# Altium PCB v1_1_1.PcbDoc (part 1 of 2)
Units mil, origin at the board's own origin, x right, y up, seen from the top; angles counter-clockwise.
Board outline 6000 x 5000 mil, 4 copper layers (Top Layer, Inner Layer 1, Inner Layer 2, Bottom Layer), stack 61.811 mil thick; 59 components, 65 nets, 368 pads, 8 vias.
Unrouted connection lines stored in the file: 222.
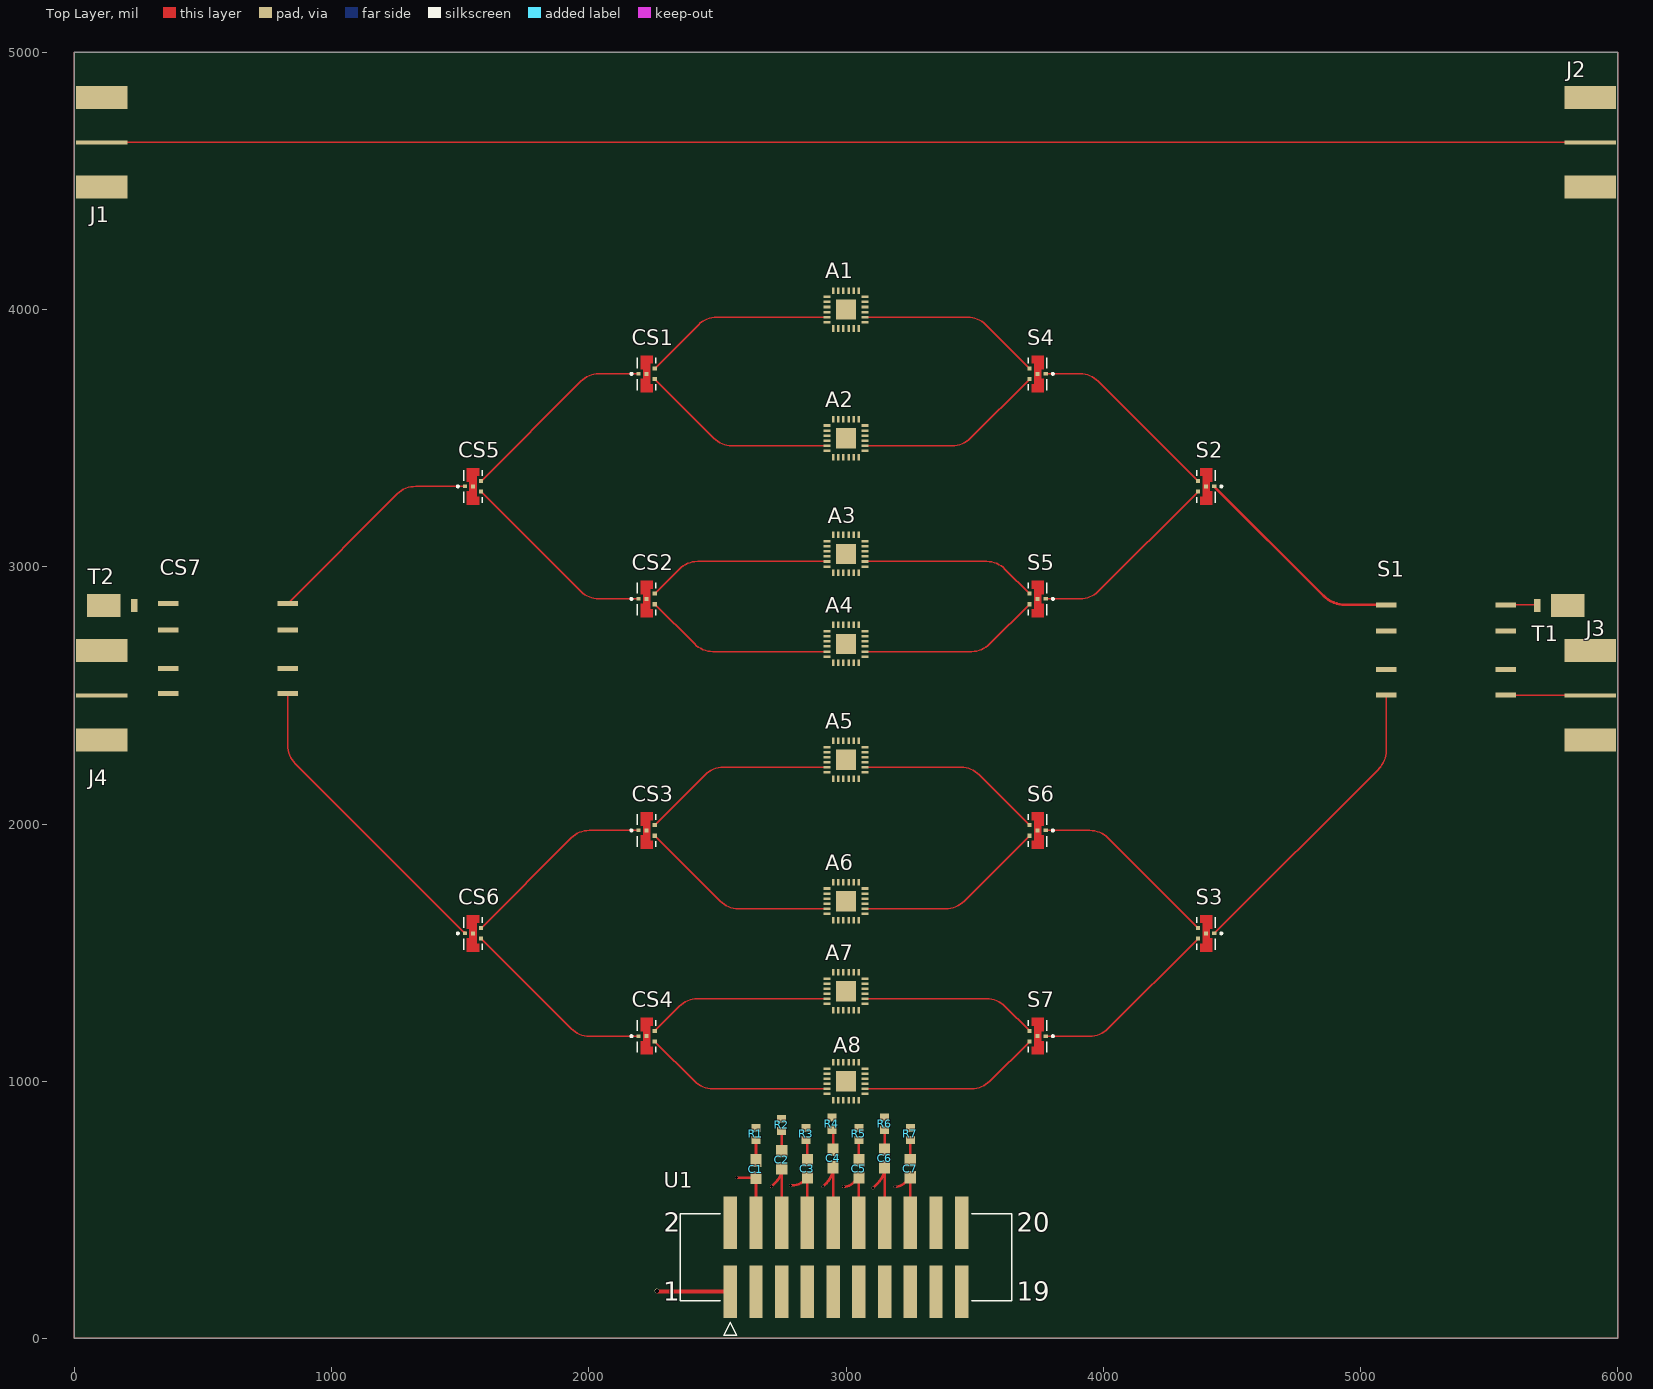
[diagram p0: Top Layer view]
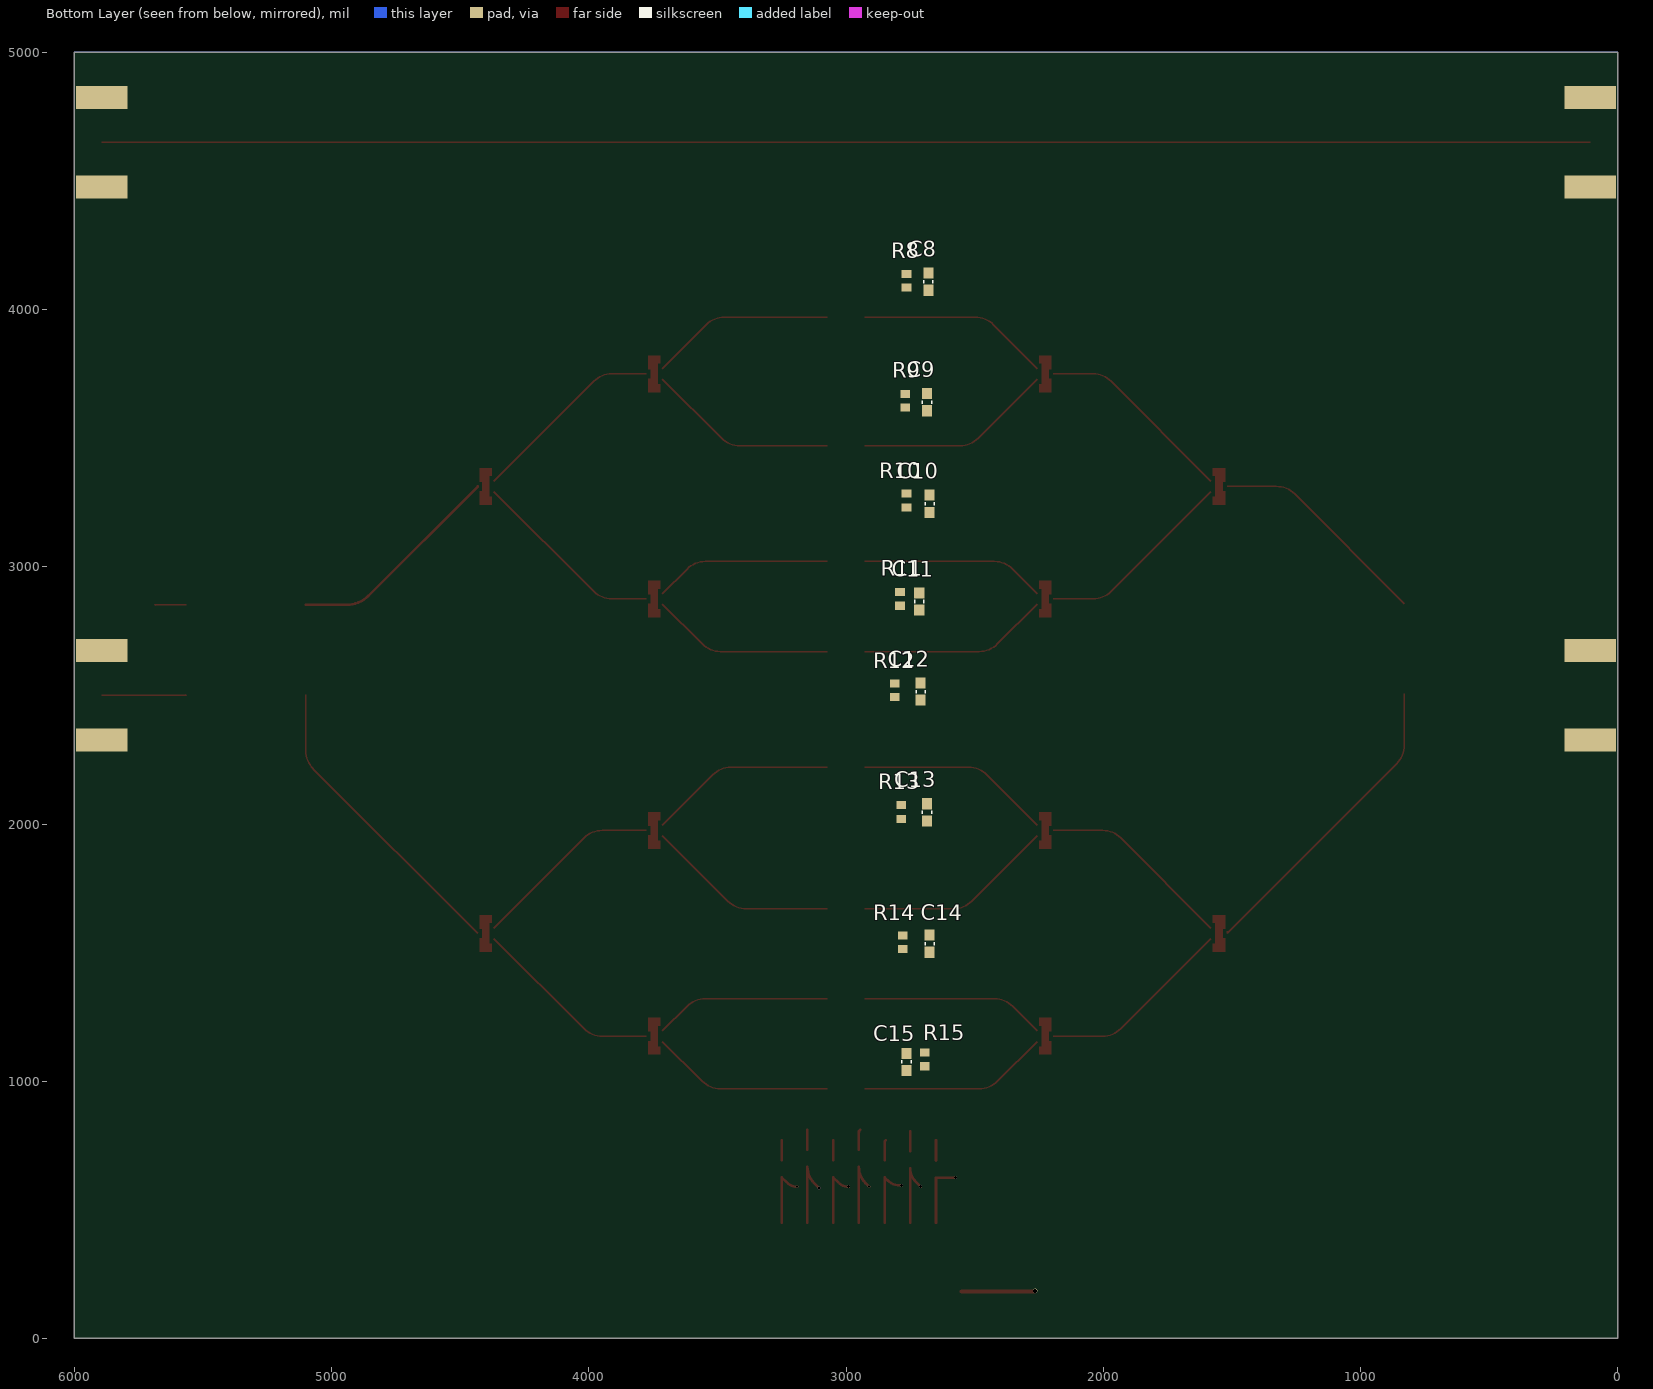
[diagram p1: Bottom Layer view, seen from below]

## Layer stack, top to bottom
Top Solder: solder mask 0.4, Solder Resist, Dk 3.5
Top Layer: signal copper 1.3779
JLC2313-1: prepreg 3.937, 2313, Dk 4.05
Inner Layer 1: signal copper 0.6889
Core: dielectric 49.8031, FR-4, Dk 4.8
Inner Layer 2: signal copper 0.6889
JLC2313-2: prepreg 3.937, 2313, Dk 4.05
Bottom Layer: signal copper 1.3779
Bottom Solder: solder mask 0.4, Solder Resist, Dk 3.5

## Board outline
0,0 6000,0 6000,5000 0,5000

## Design rules (kind name [scope] priority, off if disabled: settings)
Clearance "Schematic Clearance Constraint" [InNet('C1_0_1')] p1: gap=10 ignorepadtopadclearanceinfootprint=FALSE except(0: Arc-Hole Track-Hole SMDPad-Hole THPad-Hole Via-Hole Fill-Hole Poly-Hole Region-Hole Text-Hole; 6: Arc-Via Track-Via; 15: Arc-Arc Arc-Track Track-Track)
Clearance [All] p2: gap=10 ignorepadtopadclearanceinfootprint=FALSE except(0: Arc-Hole Track-Hole SMDPad-Hole THPad-Hole Via-Hole Fill-Hole Poly-Hole Region-Hole Text-Hole)
PolygonConnect [All] p1: connectstyle=Relief reliefconductorwidth=10 reliefentries=4 polygonreliefangle="90 Angle" airgapwidth=10
RoutingVias [All] p1: holewidth=28 width=50 viastyle="Through Hole" minholewidth=28 minwidth=50 maxholewidth=28 maxwidth=50
SolderMaskExpansion [All] p1: expansion=4
Width "Schematic Width Constraint_66" [InNet('VDD')] p1: maxlimit=16 minlimit=10 preferedwidth=10 toplayer_prefwidth=16 midlayer1_maxwidth=10 midlayer2_maxwidth=10 bottomlayer_maxwidth=10 substack1={533BCD00-AA76-48C8-A1A6-F2B08F64B16E} toplayer_{533bcd00-aa76-48c8-a1a6-f2b08f64b16e}_maxwidth=10 toplayer_{533bcd00-aa76-48c8-a1a6-f2b08f64b16e}_prefwidth=16 midlayer1_{533bcd00-aa76-48c8-a1a6-f2b08f64b16e}_maxwidth=10 midlayer1_{533bcd00-aa76-48c8-a1a6-f2b08f64b16e}_prefwidth=16 midlayer2_{533bcd00-aa76-48c8-a1a6-f2b08f64b16e}_maxwidth=10 midlayer2_{533bcd00-aa76-48c8-a1a6-f2b08f64b16e}_prefwidth=16 bottomlayer_{533bcd00-aa76-48c8-a1a6-f2b08f64b16e}_maxwidth=10 bottomlayer_{533bcd00-aa76-48c8-a1a6-f2b08f64b16e}_prefwidth=16 minimp=50.000000 maximp=50.000000 favimp=50.000000
Width "Schematic Width Constraint_65" [InNet('GND')] p2: maxlimit=16 minlimit=10 preferedwidth=10 toplayer_prefwidth=16 midlayer1_maxwidth=10 midlayer2_maxwidth=10 bottomlayer_maxwidth=10 substack1={533BCD00-AA76-48C8-A1A6-F2B08F64B16E} toplayer_{533bcd00-aa76-48c8-a1a6-f2b08f64b16e}_maxwidth=10 toplayer_{533bcd00-aa76-48c8-a1a6-f2b08f64b16e}_prefwidth=16 midlayer1_{533bcd00-aa76-48c8-a1a6-f2b08f64b16e}_maxwidth=10 midlayer1_{533bcd00-aa76-48c8-a1a6-f2b08f64b16e}_prefwidth=16 midlayer2_{533bcd00-aa76-48c8-a1a6-f2b08f64b16e}_maxwidth=10 midlayer2_{533bcd00-aa76-48c8-a1a6-f2b08f64b16e}_prefwidth=16 bottomlayer_{533bcd00-aa76-48c8-a1a6-f2b08f64b16e}_maxwidth=10 bottomlayer_{533bcd00-aa76-48c8-a1a6-f2b08f64b16e}_prefwidth=16 minimp=50.000000 maximp=50.000000 favimp=50.000000
Width "Schematic Width Constraint_64" [InNet('S7_90_2')] p3: maxlimit=10 minlimit=5.78 preferedwidth=10 toplayer_maxwidth=5.78 midlayer1_minwidth=10 midlayer2_minwidth=10 bottomlayer_minwidth=10 substack1={533BCD00-AA76-48C8-A1A6-F2B08F64B16E} toplayer_{533bcd00-aa76-48c8-a1a6-f2b08f64b16e}_minwidth=10 toplayer_{533bcd00-aa76-48c8-a1a6-f2b08f64b16e}_maxwidth=5.78 toplayer_{533bcd00-aa76-48c8-a1a6-f2b08f64b16e}_prefwidth=5.78 midlayer1_{533bcd00-aa76-48c8-a1a6-f2b08f64b16e}_minwidth=10 midlayer1_{533bcd00-aa76-48c8-a1a6-f2b08f64b16e}_maxwidth=5.78 midlayer1_{533bcd00-aa76-48c8-a1a6-f2b08f64b16e}_prefwidth=5.78 midlayer2_{533bcd00-aa76-48c8-a1a6-f2b08f64b16e}_minwidth=10 midlayer2_{533bcd00-aa76-48c8-a1a6-f2b08f64b16e}_maxwidth=5.78 midlayer2_{533bcd00-aa76-48c8-a1a6-f2b08f64b16e}_prefwidth=5.78 bottomlayer_{533bcd00-aa76-48c8-a1a6-f2b08f64b16e}_minwidth=10 bottomlayer_{533bcd00-aa76-48c8-a1a6-f2b08f64b16e}_maxwidth=5.78 bottomlayer_{533bcd00-aa76-48c8-a1a6-f2b08f64b16e}_prefwidth=5.78 minimp=50.000000 maximp=50.000000 favimp=50.000000
Width "Schematic Width Constraint_63" [InNet('S7_90_1')] p4: maxlimit=10 minlimit=5.78 preferedwidth=10 toplayer_maxwidth=5.78 midlayer1_minwidth=10 midlayer2_minwidth=10 bottomlayer_minwidth=10 substack1={533BCD00-AA76-48C8-A1A6-F2B08F64B16E} toplayer_{533bcd00-aa76-48c8-a1a6-f2b08f64b16e}_minwidth=10 toplayer_{533bcd00-aa76-48c8-a1a6-f2b08f64b16e}_maxwidth=5.78 toplayer_{533bcd00-aa76-48c8-a1a6-f2b08f64b16e}_prefwidth=5.78 midlayer1_{533bcd00-aa76-48c8-a1a6-f2b08f64b16e}_minwidth=10 midlayer1_{533bcd00-aa76-48c8-a1a6-f2b08f64b16e}_maxwidth=5.78 midlayer1_{533bcd00-aa76-48c8-a1a6-f2b08f64b16e}_prefwidth=5.78 midlayer2_{533bcd00-aa76-48c8-a1a6-f2b08f64b16e}_minwidth=10 midlayer2_{533bcd00-aa76-48c8-a1a6-f2b08f64b16e}_maxwidth=5.78 midlayer2_{533bcd00-aa76-48c8-a1a6-f2b08f64b16e}_prefwidth=5.78 bottomlayer_{533bcd00-aa76-48c8-a1a6-f2b08f64b16e}_minwidth=10 bottomlayer_{533bcd00-aa76-48c8-a1a6-f2b08f64b16e}_maxwidth=5.78 bottomlayer_{533bcd00-aa76-48c8-a1a6-f2b08f64b16e}_prefwidth=5.78 minimp=50.000000 maximp=50.000000 favimp=50.000000
Width "Schematic Width Constraint_30" [InNet('S6_90_2')] p5: maxlimit=10 minlimit=5.78 preferedwidth=10 toplayer_maxwidth=5.78 midlayer1_minwidth=10 midlayer2_minwidth=10 bottomlayer_minwidth=10 substack1={533BCD00-AA76-48C8-A1A6-F2B08F64B16E} toplayer_{533bcd00-aa76-48c8-a1a6-f2b08f64b16e}_minwidth=10 toplayer_{533bcd00-aa76-48c8-a1a6-f2b08f64b16e}_maxwidth=5.78 toplayer_{533bcd00-aa76-48c8-a1a6-f2b08f64b16e}_prefwidth=5.78 midlayer1_{533bcd00-aa76-48c8-a1a6-f2b08f64b16e}_minwidth=10 midlayer1_{533bcd00-aa76-48c8-a1a6-f2b08f64b16e}_maxwidth=5.78 midlayer1_{533bcd00-aa76-48c8-a1a6-f2b08f64b16e}_prefwidth=5.78 midlayer2_{533bcd00-aa76-48c8-a1a6-f2b08f64b16e}_minwidth=10 midlayer2_{533bcd00-aa76-48c8-a1a6-f2b08f64b16e}_maxwidth=5.78 midlayer2_{533bcd00-aa76-48c8-a1a6-f2b08f64b16e}_prefwidth=5.78 bottomlayer_{533bcd00-aa76-48c8-a1a6-f2b08f64b16e}_minwidth=10 bottomlayer_{533bcd00-aa76-48c8-a1a6-f2b08f64b16e}_maxwidth=5.78 bottomlayer_{533bcd00-aa76-48c8-a1a6-f2b08f64b16e}_prefwidth=5.78 minimp=50.000000 maximp=50.000000 favimp=50.000000
Width "Schematic Width Constraint_29" [InNet('S6_90_1')] p6: maxlimit=10 minlimit=5.78 preferedwidth=10 toplayer_maxwidth=5.78 midlayer1_minwidth=10 midlayer2_minwidth=10 bottomlayer_minwidth=10 substack1={533BCD00-AA76-48C8-A1A6-F2B08F64B16E} toplayer_{533bcd00-aa76-48c8-a1a6-f2b08f64b16e}_minwidth=10 toplayer_{533bcd00-aa76-48c8-a1a6-f2b08f64b16e}_maxwidth=5.78 toplayer_{533bcd00-aa76-48c8-a1a6-f2b08f64b16e}_prefwidth=5.78 midlayer1_{533bcd00-aa76-48c8-a1a6-f2b08f64b16e}_minwidth=10 midlayer1_{533bcd00-aa76-48c8-a1a6-f2b08f64b16e}_maxwidth=5.78 midlayer1_{533bcd00-aa76-48c8-a1a6-f2b08f64b16e}_prefwidth=5.78 midlayer2_{533bcd00-aa76-48c8-a1a6-f2b08f64b16e}_minwidth=10 midlayer2_{533bcd00-aa76-48c8-a1a6-f2b08f64b16e}_maxwidth=5.78 midlayer2_{533bcd00-aa76-48c8-a1a6-f2b08f64b16e}_prefwidth=5.78 bottomlayer_{533bcd00-aa76-48c8-a1a6-f2b08f64b16e}_minwidth=10 bottomlayer_{533bcd00-aa76-48c8-a1a6-f2b08f64b16e}_maxwidth=5.78 bottomlayer_{533bcd00-aa76-48c8-a1a6-f2b08f64b16e}_prefwidth=5.78 minimp=50.000000 maximp=50.000000 favimp=50.000000
Width "Schematic Width Constraint_28" [InNet('S5_0_2')] p7: maxlimit=10 minlimit=5.78 preferedwidth=10 toplayer_maxwidth=5.78 midlayer1_minwidth=10 midlayer2_minwidth=10 bottomlayer_minwidth=10 substack1={533BCD00-AA76-48C8-A1A6-F2B08F64B16E} toplayer_{533bcd00-aa76-48c8-a1a6-f2b08f64b16e}_minwidth=10 toplayer_{533bcd00-aa76-48c8-a1a6-f2b08f64b16e}_maxwidth=5.78 toplayer_{533bcd00-aa76-48c8-a1a6-f2b08f64b16e}_prefwidth=5.78 midlayer1_{533bcd00-aa76-48c8-a1a6-f2b08f64b16e}_minwidth=10 midlayer1_{533bcd00-aa76-48c8-a1a6-f2b08f64b16e}_maxwidth=5.78 midlayer1_{533bcd00-aa76-48c8-a1a6-f2b08f64b16e}_prefwidth=5.78 midlayer2_{533bcd00-aa76-48c8-a1a6-f2b08f64b16e}_minwidth=10 midlayer2_{533bcd00-aa76-48c8-a1a6-f2b08f64b16e}_maxwidth=5.78 midlayer2_{533bcd00-aa76-48c8-a1a6-f2b08f64b16e}_prefwidth=5.78 bottomlayer_{533bcd00-aa76-48c8-a1a6-f2b08f64b16e}_minwidth=10 bottomlayer_{533bcd00-aa76-48c8-a1a6-f2b08f64b16e}_maxwidth=5.78 bottomlayer_{533bcd00-aa76-48c8-a1a6-f2b08f64b16e}_prefwidth=5.78 minimp=50.000000 maximp=50.000000 favimp=50.000000
Width "Schematic Width Constraint_27" [InNet('S5_0_1')] p8: maxlimit=10 minlimit=5.78 preferedwidth=10 toplayer_maxwidth=5.78 midlayer1_minwidth=10 midlayer2_minwidth=10 bottomlayer_minwidth=10 substack1={533BCD00-AA76-48C8-A1A6-F2B08F64B16E} toplayer_{533bcd00-aa76-48c8-a1a6-f2b08f64b16e}_minwidth=10 toplayer_{533bcd00-aa76-48c8-a1a6-f2b08f64b16e}_maxwidth=5.78 toplayer_{533bcd00-aa76-48c8-a1a6-f2b08f64b16e}_prefwidth=5.78 midlayer1_{533bcd00-aa76-48c8-a1a6-f2b08f64b16e}_minwidth=10 midlayer1_{533bcd00-aa76-48c8-a1a6-f2b08f64b16e}_maxwidth=5.78 midlayer1_{533bcd00-aa76-48c8-a1a6-f2b08f64b16e}_prefwidth=5.78 midlayer2_{533bcd00-aa76-48c8-a1a6-f2b08f64b16e}_minwidth=10 midlayer2_{533bcd00-aa76-48c8-a1a6-f2b08f64b16e}_maxwidth=5.78 midlayer2_{533bcd00-aa76-48c8-a1a6-f2b08f64b16e}_prefwidth=5.78 bottomlayer_{533bcd00-aa76-48c8-a1a6-f2b08f64b16e}_minwidth=10 bottomlayer_{533bcd00-aa76-48c8-a1a6-f2b08f64b16e}_maxwidth=5.78 bottomlayer_{533bcd00-aa76-48c8-a1a6-f2b08f64b16e}_prefwidth=5.78 minimp=50.000000 maximp=50.000000 favimp=50.000000
Width "Schematic Width Constraint_26" [InNet('S4_0_2')] p9: maxlimit=10 minlimit=5.78 preferedwidth=10 toplayer_maxwidth=5.78 midlayer1_minwidth=10 midlayer2_minwidth=10 bottomlayer_minwidth=10 substack1={533BCD00-AA76-48C8-A1A6-F2B08F64B16E} toplayer_{533bcd00-aa76-48c8-a1a6-f2b08f64b16e}_minwidth=10 toplayer_{533bcd00-aa76-48c8-a1a6-f2b08f64b16e}_maxwidth=5.78 toplayer_{533bcd00-aa76-48c8-a1a6-f2b08f64b16e}_prefwidth=5.78 midlayer1_{533bcd00-aa76-48c8-a1a6-f2b08f64b16e}_minwidth=10 midlayer1_{533bcd00-aa76-48c8-a1a6-f2b08f64b16e}_maxwidth=5.78 midlayer1_{533bcd00-aa76-48c8-a1a6-f2b08f64b16e}_prefwidth=5.78 midlayer2_{533bcd00-aa76-48c8-a1a6-f2b08f64b16e}_minwidth=10 midlayer2_{533bcd00-aa76-48c8-a1a6-f2b08f64b16e}_maxwidth=5.78 midlayer2_{533bcd00-aa76-48c8-a1a6-f2b08f64b16e}_prefwidth=5.78 bottomlayer_{533bcd00-aa76-48c8-a1a6-f2b08f64b16e}_minwidth=10 bottomlayer_{533bcd00-aa76-48c8-a1a6-f2b08f64b16e}_maxwidth=5.78 bottomlayer_{533bcd00-aa76-48c8-a1a6-f2b08f64b16e}_prefwidth=5.78 minimp=50.000000 maximp=50.000000 favimp=50.000000
Width "Schematic Width Constraint_25" [InNet('NetCS7_4')] p10: maxlimit=10 minlimit=5.78 preferedwidth=10 toplayer_maxwidth=5.78 midlayer1_minwidth=10 midlayer2_minwidth=10 bottomlayer_minwidth=10 substack1={533BCD00-AA76-48C8-A1A6-F2B08F64B16E} toplayer_{533bcd00-aa76-48c8-a1a6-f2b08f64b16e}_minwidth=10 toplayer_{533bcd00-aa76-48c8-a1a6-f2b08f64b16e}_maxwidth=5.78 toplayer_{533bcd00-aa76-48c8-a1a6-f2b08f64b16e}_prefwidth=5.78 midlayer1_{533bcd00-aa76-48c8-a1a6-f2b08f64b16e}_minwidth=10 midlayer1_{533bcd00-aa76-48c8-a1a6-f2b08f64b16e}_maxwidth=5.78 midlayer1_{533bcd00-aa76-48c8-a1a6-f2b08f64b16e}_prefwidth=5.78 midlayer2_{533bcd00-aa76-48c8-a1a6-f2b08f64b16e}_minwidth=10 midlayer2_{533bcd00-aa76-48c8-a1a6-f2b08f64b16e}_maxwidth=5.78 midlayer2_{533bcd00-aa76-48c8-a1a6-f2b08f64b16e}_prefwidth=5.78 bottomlayer_{533bcd00-aa76-48c8-a1a6-f2b08f64b16e}_minwidth=10 bottomlayer_{533bcd00-aa76-48c8-a1a6-f2b08f64b16e}_maxwidth=5.78 bottomlayer_{533bcd00-aa76-48c8-a1a6-f2b08f64b16e}_prefwidth=5.78 minimp=50.000000 maximp=50.000000 favimp=50.000000
Width "Schematic Width Constraint_24" [InNet('NetS1_8')] p11: maxlimit=10 minlimit=5.78 preferedwidth=10 toplayer_maxwidth=5.78 midlayer1_minwidth=10 midlayer2_minwidth=10 bottomlayer_minwidth=10 substack1={533BCD00-AA76-48C8-A1A6-F2B08F64B16E} toplayer_{533bcd00-aa76-48c8-a1a6-f2b08f64b16e}_minwidth=10 toplayer_{533bcd00-aa76-48c8-a1a6-f2b08f64b16e}_maxwidth=5.78 toplayer_{533bcd00-aa76-48c8-a1a6-f2b08f64b16e}_prefwidth=5.78 midlayer1_{533bcd00-aa76-48c8-a1a6-f2b08f64b16e}_minwidth=10 midlayer1_{533bcd00-aa76-48c8-a1a6-f2b08f64b16e}_maxwidth=5.78 midlayer1_{533bcd00-aa76-48c8-a1a6-f2b08f64b16e}_prefwidth=5.78 midlayer2_{533bcd00-aa76-48c8-a1a6-f2b08f64b16e}_minwidth=10 midlayer2_{533bcd00-aa76-48c8-a1a6-f2b08f64b16e}_maxwidth=5.78 midlayer2_{533bcd00-aa76-48c8-a1a6-f2b08f64b16e}_prefwidth=5.78 bottomlayer_{533bcd00-aa76-48c8-a1a6-f2b08f64b16e}_minwidth=10 bottomlayer_{533bcd00-aa76-48c8-a1a6-f2b08f64b16e}_maxwidth=5.78 bottomlayer_{533bcd00-aa76-48c8-a1a6-f2b08f64b16e}_prefwidth=5.78 minimp=50.000000 maximp=50.000000 favimp=50.000000
Width "Schematic Width Constraint_22" [InNet('C7_90')] p12: maxlimit=10 minlimit=5.78 preferedwidth=10 toplayer_maxwidth=5.78 midlayer1_minwidth=10 midlayer2_minwidth=10 bottomlayer_minwidth=10 substack1={533BCD00-AA76-48C8-A1A6-F2B08F64B16E} toplayer_{533bcd00-aa76-48c8-a1a6-f2b08f64b16e}_minwidth=10 toplayer_{533bcd00-aa76-48c8-a1a6-f2b08f64b16e}_maxwidth=5.78 toplayer_{533bcd00-aa76-48c8-a1a6-f2b08f64b16e}_prefwidth=5.78 midlayer1_{533bcd00-aa76-48c8-a1a6-f2b08f64b16e}_minwidth=10 midlayer1_{533bcd00-aa76-48c8-a1a6-f2b08f64b16e}_maxwidth=5.78 midlayer1_{533bcd00-aa76-48c8-a1a6-f2b08f64b16e}_prefwidth=5.78 midlayer2_{533bcd00-aa76-48c8-a1a6-f2b08f64b16e}_minwidth=10 midlayer2_{533bcd00-aa76-48c8-a1a6-f2b08f64b16e}_maxwidth=5.78 midlayer2_{533bcd00-aa76-48c8-a1a6-f2b08f64b16e}_prefwidth=5.78 bottomlayer_{533bcd00-aa76-48c8-a1a6-f2b08f64b16e}_minwidth=10 bottomlayer_{533bcd00-aa76-48c8-a1a6-f2b08f64b16e}_maxwidth=5.78 bottomlayer_{533bcd00-aa76-48c8-a1a6-f2b08f64b16e}_prefwidth=5.78 minimp=50.000000 maximp=50.000000 favimp=50.000000
Width "Schematic Width Constraint_21" [InNet('C7_0')] p13: maxlimit=10 minlimit=5.78 preferedwidth=10 toplayer_maxwidth=5.78 midlayer1_minwidth=10 midlayer2_minwidth=10 bottomlayer_minwidth=10 substack1={533BCD00-AA76-48C8-A1A6-F2B08F64B16E} toplayer_{533bcd00-aa76-48c8-a1a6-f2b08f64b16e}_minwidth=10 toplayer_{533bcd00-aa76-48c8-a1a6-f2b08f64b16e}_maxwidth=5.78 toplayer_{533bcd00-aa76-48c8-a1a6-f2b08f64b16e}_prefwidth=5.78 midlayer1_{533bcd00-aa76-48c8-a1a6-f2b08f64b16e}_minwidth=10 midlayer1_{533bcd00-aa76-48c8-a1a6-f2b08f64b16e}_maxwidth=5.78 midlayer1_{533bcd00-aa76-48c8-a1a6-f2b08f64b16e}_prefwidth=5.78 midlayer2_{533bcd00-aa76-48c8-a1a6-f2b08f64b16e}_minwidth=10 midlayer2_{533bcd00-aa76-48c8-a1a6-f2b08f64b16e}_maxwidth=5.78 midlayer2_{533bcd00-aa76-48c8-a1a6-f2b08f64b16e}_prefwidth=5.78 bottomlayer_{533bcd00-aa76-48c8-a1a6-f2b08f64b16e}_minwidth=10 bottomlayer_{533bcd00-aa76-48c8-a1a6-f2b08f64b16e}_maxwidth=5.78 bottomlayer_{533bcd00-aa76-48c8-a1a6-f2b08f64b16e}_prefwidth=5.78 minimp=50.000000 maximp=50.000000 favimp=50.000000
Width "Schematic Width Constraint_20" [InNet('C6_90_2')] p14: maxlimit=10 minlimit=5.78 preferedwidth=10 toplayer_maxwidth=5.78 midlayer1_minwidth=10 midlayer2_minwidth=10 bottomlayer_minwidth=10 substack1={533BCD00-AA76-48C8-A1A6-F2B08F64B16E} toplayer_{533bcd00-aa76-48c8-a1a6-f2b08f64b16e}_minwidth=10 toplayer_{533bcd00-aa76-48c8-a1a6-f2b08f64b16e}_maxwidth=5.78 toplayer_{533bcd00-aa76-48c8-a1a6-f2b08f64b16e}_prefwidth=5.78 midlayer1_{533bcd00-aa76-48c8-a1a6-f2b08f64b16e}_minwidth=10 midlayer1_{533bcd00-aa76-48c8-a1a6-f2b08f64b16e}_maxwidth=5.78 midlayer1_{533bcd00-aa76-48c8-a1a6-f2b08f64b16e}_prefwidth=5.78 midlayer2_{533bcd00-aa76-48c8-a1a6-f2b08f64b16e}_minwidth=10 midlayer2_{533bcd00-aa76-48c8-a1a6-f2b08f64b16e}_maxwidth=5.78 midlayer2_{533bcd00-aa76-48c8-a1a6-f2b08f64b16e}_prefwidth=5.78 bottomlayer_{533bcd00-aa76-48c8-a1a6-f2b08f64b16e}_minwidth=10 bottomlayer_{533bcd00-aa76-48c8-a1a6-f2b08f64b16e}_maxwidth=5.78 bottomlayer_{533bcd00-aa76-48c8-a1a6-f2b08f64b16e}_prefwidth=5.78 minimp=50.000000 maximp=50.000000 favimp=50.000000
Width "Schematic Width Constraint_19" [InNet('C6_90_1')] p15: maxlimit=10 minlimit=5.78 preferedwidth=10 toplayer_maxwidth=5.78 midlayer1_minwidth=10 midlayer2_minwidth=10 bottomlayer_minwidth=10 substack1={533BCD00-AA76-48C8-A1A6-F2B08F64B16E} toplayer_{533bcd00-aa76-48c8-a1a6-f2b08f64b16e}_minwidth=10 toplayer_{533bcd00-aa76-48c8-a1a6-f2b08f64b16e}_maxwidth=5.78 toplayer_{533bcd00-aa76-48c8-a1a6-f2b08f64b16e}_prefwidth=5.78 midlayer1_{533bcd00-aa76-48c8-a1a6-f2b08f64b16e}_minwidth=10 midlayer1_{533bcd00-aa76-48c8-a1a6-f2b08f64b16e}_maxwidth=5.78 midlayer1_{533bcd00-aa76-48c8-a1a6-f2b08f64b16e}_prefwidth=5.78 midlayer2_{533bcd00-aa76-48c8-a1a6-f2b08f64b16e}_minwidth=10 midlayer2_{533bcd00-aa76-48c8-a1a6-f2b08f64b16e}_maxwidth=5.78 midlayer2_{533bcd00-aa76-48c8-a1a6-f2b08f64b16e}_prefwidth=5.78 bottomlayer_{533bcd00-aa76-48c8-a1a6-f2b08f64b16e}_minwidth=10 bottomlayer_{533bcd00-aa76-48c8-a1a6-f2b08f64b16e}_maxwidth=5.78 bottomlayer_{533bcd00-aa76-48c8-a1a6-f2b08f64b16e}_prefwidth=5.78 minimp=50.000000 maximp=50.000000 favimp=50.000000
Width "Schematic Width Constraint_18" [InNet('C5_0_2')] p16: maxlimit=10 minlimit=5.78 preferedwidth=10 toplayer_maxwidth=5.78 midlayer1_minwidth=10 midlayer2_minwidth=10 bottomlayer_minwidth=10 substack1={533BCD00-AA76-48C8-A1A6-F2B08F64B16E} toplayer_{533bcd00-aa76-48c8-a1a6-f2b08f64b16e}_minwidth=10 toplayer_{533bcd00-aa76-48c8-a1a6-f2b08f64b16e}_maxwidth=5.78 toplayer_{533bcd00-aa76-48c8-a1a6-f2b08f64b16e}_prefwidth=5.78 midlayer1_{533bcd00-aa76-48c8-a1a6-f2b08f64b16e}_minwidth=10 midlayer1_{533bcd00-aa76-48c8-a1a6-f2b08f64b16e}_maxwidth=5.78 midlayer1_{533bcd00-aa76-48c8-a1a6-f2b08f64b16e}_prefwidth=5.78 midlayer2_{533bcd00-aa76-48c8-a1a6-f2b08f64b16e}_minwidth=10 midlayer2_{533bcd00-aa76-48c8-a1a6-f2b08f64b16e}_maxwidth=5.78 midlayer2_{533bcd00-aa76-48c8-a1a6-f2b08f64b16e}_prefwidth=5.78 bottomlayer_{533bcd00-aa76-48c8-a1a6-f2b08f64b16e}_minwidth=10 bottomlayer_{533bcd00-aa76-48c8-a1a6-f2b08f64b16e}_maxwidth=5.78 bottomlayer_{533bcd00-aa76-48c8-a1a6-f2b08f64b16e}_prefwidth=5.78 minimp=50.000000 maximp=50.000000 favimp=50.000000
Width "Schematic Width Constraint_17" [InNet('C5_0_1')] p17: maxlimit=10 minlimit=5.78 preferedwidth=10 toplayer_maxwidth=5.78 midlayer1_minwidth=10 midlayer2_minwidth=10 bottomlayer_minwidth=10 substack1={533BCD00-AA76-48C8-A1A6-F2B08F64B16E} toplayer_{533bcd00-aa76-48c8-a1a6-f2b08f64b16e}_minwidth=10 toplayer_{533bcd00-aa76-48c8-a1a6-f2b08f64b16e}_maxwidth=5.78 toplayer_{533bcd00-aa76-48c8-a1a6-f2b08f64b16e}_prefwidth=5.78 midlayer1_{533bcd00-aa76-48c8-a1a6-f2b08f64b16e}_minwidth=10 midlayer1_{533bcd00-aa76-48c8-a1a6-f2b08f64b16e}_maxwidth=5.78 midlayer1_{533bcd00-aa76-48c8-a1a6-f2b08f64b16e}_prefwidth=5.78 midlayer2_{533bcd00-aa76-48c8-a1a6-f2b08f64b16e}_minwidth=10 midlayer2_{533bcd00-aa76-48c8-a1a6-f2b08f64b16e}_maxwidth=5.78 midlayer2_{533bcd00-aa76-48c8-a1a6-f2b08f64b16e}_prefwidth=5.78 bottomlayer_{533bcd00-aa76-48c8-a1a6-f2b08f64b16e}_minwidth=10 bottomlayer_{533bcd00-aa76-48c8-a1a6-f2b08f64b16e}_maxwidth=5.78 bottomlayer_{533bcd00-aa76-48c8-a1a6-f2b08f64b16e}_prefwidth=5.78 minimp=50.000000 maximp=50.000000 favimp=50.000000
Width "Schematic Width Constraint_16" [InNet('C4_90_1')] p18: maxlimit=10 minlimit=5.78 preferedwidth=10 toplayer_maxwidth=5.78 midlayer1_minwidth=10 midlayer2_minwidth=10 bottomlayer_minwidth=10 substack1={533BCD00-AA76-48C8-A1A6-F2B08F64B16E} toplayer_{533bcd00-aa76-48c8-a1a6-f2b08f64b16e}_minwidth=10 toplayer_{533bcd00-aa76-48c8-a1a6-f2b08f64b16e}_maxwidth=5.78 toplayer_{533bcd00-aa76-48c8-a1a6-f2b08f64b16e}_prefwidth=5.78 midlayer1_{533bcd00-aa76-48c8-a1a6-f2b08f64b16e}_minwidth=10 midlayer1_{533bcd00-aa76-48c8-a1a6-f2b08f64b16e}_maxwidth=5.78 midlayer1_{533bcd00-aa76-48c8-a1a6-f2b08f64b16e}_prefwidth=5.78 midlayer2_{533bcd00-aa76-48c8-a1a6-f2b08f64b16e}_minwidth=10 midlayer2_{533bcd00-aa76-48c8-a1a6-f2b08f64b16e}_maxwidth=5.78 midlayer2_{533bcd00-aa76-48c8-a1a6-f2b08f64b16e}_prefwidth=5.78 bottomlayer_{533bcd00-aa76-48c8-a1a6-f2b08f64b16e}_minwidth=10 bottomlayer_{533bcd00-aa76-48c8-a1a6-f2b08f64b16e}_maxwidth=5.78 bottomlayer_{533bcd00-aa76-48c8-a1a6-f2b08f64b16e}_prefwidth=5.78 minimp=50.000000 maximp=50.000000 favimp=50.000000
Width "Schematic Width Constraint_15" [InNet('C3_90_2')] p19: maxlimit=10 minlimit=5.78 preferedwidth=10 toplayer_maxwidth=5.78 midlayer1_minwidth=10 midlayer2_minwidth=10 bottomlayer_minwidth=10 substack1={533BCD00-AA76-48C8-A1A6-F2B08F64B16E} toplayer_{533bcd00-aa76-48c8-a1a6-f2b08f64b16e}_minwidth=10 toplayer_{533bcd00-aa76-48c8-a1a6-f2b08f64b16e}_maxwidth=5.78 toplayer_{533bcd00-aa76-48c8-a1a6-f2b08f64b16e}_prefwidth=5.78 midlayer1_{533bcd00-aa76-48c8-a1a6-f2b08f64b16e}_minwidth=10 midlayer1_{533bcd00-aa76-48c8-a1a6-f2b08f64b16e}_maxwidth=5.78 midlayer1_{533bcd00-aa76-48c8-a1a6-f2b08f64b16e}_prefwidth=5.78 midlayer2_{533bcd00-aa76-48c8-a1a6-f2b08f64b16e}_minwidth=10 midlayer2_{533bcd00-aa76-48c8-a1a6-f2b08f64b16e}_maxwidth=5.78 midlayer2_{533bcd00-aa76-48c8-a1a6-f2b08f64b16e}_prefwidth=5.78 bottomlayer_{533bcd00-aa76-48c8-a1a6-f2b08f64b16e}_minwidth=10 bottomlayer_{533bcd00-aa76-48c8-a1a6-f2b08f64b16e}_maxwidth=5.78 bottomlayer_{533bcd00-aa76-48c8-a1a6-f2b08f64b16e}_prefwidth=5.78 minimp=50.000000 maximp=50.000000 favimp=50.000000
Width "Schematic Width Constraint_14" [InNet('C3_90_1')] p20: maxlimit=10 minlimit=5.78 preferedwidth=10 toplayer_maxwidth=5.78 midlayer1_minwidth=10 midlayer2_minwidth=10 bottomlayer_minwidth=10 substack1={533BCD00-AA76-48C8-A1A6-F2B08F64B16E} toplayer_{533bcd00-aa76-48c8-a1a6-f2b08f64b16e}_minwidth=10 toplayer_{533bcd00-aa76-48c8-a1a6-f2b08f64b16e}_maxwidth=5.78 toplayer_{533bcd00-aa76-48c8-a1a6-f2b08f64b16e}_prefwidth=5.78 midlayer1_{533bcd00-aa76-48c8-a1a6-f2b08f64b16e}_minwidth=10 midlayer1_{533bcd00-aa76-48c8-a1a6-f2b08f64b16e}_maxwidth=5.78 midlayer1_{533bcd00-aa76-48c8-a1a6-f2b08f64b16e}_prefwidth=5.78 midlayer2_{533bcd00-aa76-48c8-a1a6-f2b08f64b16e}_minwidth=10 midlayer2_{533bcd00-aa76-48c8-a1a6-f2b08f64b16e}_maxwidth=5.78 midlayer2_{533bcd00-aa76-48c8-a1a6-f2b08f64b16e}_prefwidth=5.78 bottomlayer_{533bcd00-aa76-48c8-a1a6-f2b08f64b16e}_minwidth=10 bottomlayer_{533bcd00-aa76-48c8-a1a6-f2b08f64b16e}_maxwidth=5.78 bottomlayer_{533bcd00-aa76-48c8-a1a6-f2b08f64b16e}_prefwidth=5.78 minimp=50.000000 maximp=50.000000 favimp=50.000000
Width "Schematic Width Constraint_13" [InNet('C2_0_2')] p21: maxlimit=10 minlimit=5.78 preferedwidth=10 toplayer_maxwidth=5.78 midlayer1_minwidth=10 midlayer2_minwidth=10 bottomlayer_minwidth=10 substack1={533BCD00-AA76-48C8-A1A6-F2B08F64B16E} toplayer_{533bcd00-aa76-48c8-a1a6-f2b08f64b16e}_minwidth=10 toplayer_{533bcd00-aa76-48c8-a1a6-f2b08f64b16e}_maxwidth=5.78 toplayer_{533bcd00-aa76-48c8-a1a6-f2b08f64b16e}_prefwidth=5.78 midlayer1_{533bcd00-aa76-48c8-a1a6-f2b08f64b16e}_minwidth=10 midlayer1_{533bcd00-aa76-48c8-a1a6-f2b08f64b16e}_maxwidth=5.78 midlayer1_{533bcd00-aa76-48c8-a1a6-f2b08f64b16e}_prefwidth=5.78 midlayer2_{533bcd00-aa76-48c8-a1a6-f2b08f64b16e}_minwidth=10 midlayer2_{533bcd00-aa76-48c8-a1a6-f2b08f64b16e}_maxwidth=5.78 midlayer2_{533bcd00-aa76-48c8-a1a6-f2b08f64b16e}_prefwidth=5.78 bottomlayer_{533bcd00-aa76-48c8-a1a6-f2b08f64b16e}_minwidth=10 bottomlayer_{533bcd00-aa76-48c8-a1a6-f2b08f64b16e}_maxwidth=5.78 bottomlayer_{533bcd00-aa76-48c8-a1a6-f2b08f64b16e}_prefwidth=5.78 minimp=50.000000 maximp=50.000000 favimp=50.000000
Width "Schematic Width Constraint_12" [InNet('C2_0_1')] p22: maxlimit=10 minlimit=5.78 preferedwidth=10 toplayer_maxwidth=5.78 midlayer1_minwidth=10 midlayer2_minwidth=10 bottomlayer_minwidth=10 substack1={533BCD00-AA76-48C8-A1A6-F2B08F64B16E} toplayer_{533bcd00-aa76-48c8-a1a6-f2b08f64b16e}_minwidth=10 toplayer_{533bcd00-aa76-48c8-a1a6-f2b08f64b16e}_maxwidth=5.78 toplayer_{533bcd00-aa76-48c8-a1a6-f2b08f64b16e}_prefwidth=5.78 midlayer1_{533bcd00-aa76-48c8-a1a6-f2b08f64b16e}_minwidth=10 midlayer1_{533bcd00-aa76-48c8-a1a6-f2b08f64b16e}_maxwidth=5.78 midlayer1_{533bcd00-aa76-48c8-a1a6-f2b08f64b16e}_prefwidth=5.78 midlayer2_{533bcd00-aa76-48c8-a1a6-f2b08f64b16e}_minwidth=10 midlayer2_{533bcd00-aa76-48c8-a1a6-f2b08f64b16e}_maxwidth=5.78 midlayer2_{533bcd00-aa76-48c8-a1a6-f2b08f64b16e}_prefwidth=5.78 bottomlayer_{533bcd00-aa76-48c8-a1a6-f2b08f64b16e}_minwidth=10 bottomlayer_{533bcd00-aa76-48c8-a1a6-f2b08f64b16e}_maxwidth=5.78 bottomlayer_{533bcd00-aa76-48c8-a1a6-f2b08f64b16e}_prefwidth=5.78 minimp=50.000000 maximp=50.000000 favimp=50.000000
Width "Schematic Width Constraint_11" [InNet('C1_0_2')] p23: maxlimit=10 minlimit=5.78 preferedwidth=10 toplayer_maxwidth=5.78 midlayer1_minwidth=10 midlayer2_minwidth=10 bottomlayer_minwidth=10 substack1={533BCD00-AA76-48C8-A1A6-F2B08F64B16E} toplayer_{533bcd00-aa76-48c8-a1a6-f2b08f64b16e}_minwidth=10 toplayer_{533bcd00-aa76-48c8-a1a6-f2b08f64b16e}_maxwidth=5.78 toplayer_{533bcd00-aa76-48c8-a1a6-f2b08f64b16e}_prefwidth=5.78 midlayer1_{533bcd00-aa76-48c8-a1a6-f2b08f64b16e}_minwidth=10 midlayer1_{533bcd00-aa76-48c8-a1a6-f2b08f64b16e}_maxwidth=5.78 midlayer1_{533bcd00-aa76-48c8-a1a6-f2b08f64b16e}_prefwidth=5.78 midlayer2_{533bcd00-aa76-48c8-a1a6-f2b08f64b16e}_minwidth=10 midlayer2_{533bcd00-aa76-48c8-a1a6-f2b08f64b16e}_maxwidth=5.78 midlayer2_{533bcd00-aa76-48c8-a1a6-f2b08f64b16e}_prefwidth=5.78 bottomlayer_{533bcd00-aa76-48c8-a1a6-f2b08f64b16e}_minwidth=10 bottomlayer_{533bcd00-aa76-48c8-a1a6-f2b08f64b16e}_maxwidth=5.78 bottomlayer_{533bcd00-aa76-48c8-a1a6-f2b08f64b16e}_prefwidth=5.78 minimp=50.000000 maximp=50.000000 favimp=50.000000
Width "Schematic Width Constraint_10" [InNet('C4_90_2')] p24: maxlimit=10 minlimit=5.78 preferedwidth=10 toplayer_maxwidth=5.78 midlayer1_minwidth=10 midlayer2_minwidth=10 bottomlayer_minwidth=10 substack1={533BCD00-AA76-48C8-A1A6-F2B08F64B16E} toplayer_{533bcd00-aa76-48c8-a1a6-f2b08f64b16e}_minwidth=10 toplayer_{533bcd00-aa76-48c8-a1a6-f2b08f64b16e}_maxwidth=5.78 toplayer_{533bcd00-aa76-48c8-a1a6-f2b08f64b16e}_prefwidth=5.78 midlayer1_{533bcd00-aa76-48c8-a1a6-f2b08f64b16e}_minwidth=10 midlayer1_{533bcd00-aa76-48c8-a1a6-f2b08f64b16e}_maxwidth=5.78 midlayer1_{533bcd00-aa76-48c8-a1a6-f2b08f64b16e}_prefwidth=5.78 midlayer2_{533bcd00-aa76-48c8-a1a6-f2b08f64b16e}_minwidth=10 midlayer2_{533bcd00-aa76-48c8-a1a6-f2b08f64b16e}_maxwidth=5.78 midlayer2_{533bcd00-aa76-48c8-a1a6-f2b08f64b16e}_prefwidth=5.78 bottomlayer_{533bcd00-aa76-48c8-a1a6-f2b08f64b16e}_minwidth=10 bottomlayer_{533bcd00-aa76-48c8-a1a6-f2b08f64b16e}_maxwidth=5.78 bottomlayer_{533bcd00-aa76-48c8-a1a6-f2b08f64b16e}_prefwidth=5.78 minimp=50.000000 maximp=50.000000 favimp=50.000000
Width "Schematic Width Constraint_9" [InNet('S3_90_1')] p25: maxlimit=10 minlimit=5.78 preferedwidth=10 toplayer_maxwidth=5.78 midlayer1_minwidth=10 midlayer2_minwidth=10 bottomlayer_minwidth=10 substack1={533BCD00-AA76-48C8-A1A6-F2B08F64B16E} toplayer_{533bcd00-aa76-48c8-a1a6-f2b08f64b16e}_minwidth=10 toplayer_{533bcd00-aa76-48c8-a1a6-f2b08f64b16e}_maxwidth=5.78 toplayer_{533bcd00-aa76-48c8-a1a6-f2b08f64b16e}_prefwidth=5.78 midlayer1_{533bcd00-aa76-48c8-a1a6-f2b08f64b16e}_minwidth=10 midlayer1_{533bcd00-aa76-48c8-a1a6-f2b08f64b16e}_maxwidth=5.78 midlayer1_{533bcd00-aa76-48c8-a1a6-f2b08f64b16e}_prefwidth=5.78 midlayer2_{533bcd00-aa76-48c8-a1a6-f2b08f64b16e}_minwidth=10 midlayer2_{533bcd00-aa76-48c8-a1a6-f2b08f64b16e}_maxwidth=5.78 midlayer2_{533bcd00-aa76-48c8-a1a6-f2b08f64b16e}_prefwidth=5.78 bottomlayer_{533bcd00-aa76-48c8-a1a6-f2b08f64b16e}_minwidth=10 bottomlayer_{533bcd00-aa76-48c8-a1a6-f2b08f64b16e}_maxwidth=5.78 bottomlayer_{533bcd00-aa76-48c8-a1a6-f2b08f64b16e}_prefwidth=5.78 minimp=50.000000 maximp=50.000000 favimp=50.000000
Width "Schematic Width Constraint_8" [InNet('S2_0_2')] p26: maxlimit=10 minlimit=5.78 preferedwidth=10 toplayer_maxwidth=5.78 midlayer1_minwidth=10 midlayer2_minwidth=10 bottomlayer_minwidth=10 substack1={533BCD00-AA76-48C8-A1A6-F2B08F64B16E} toplayer_{533bcd00-aa76-48c8-a1a6-f2b08f64b16e}_minwidth=10 toplayer_{533bcd00-aa76-48c8-a1a6-f2b08f64b16e}_maxwidth=5.78 toplayer_{533bcd00-aa76-48c8-a1a6-f2b08f64b16e}_prefwidth=5.78 midlayer1_{533bcd00-aa76-48c8-a1a6-f2b08f64b16e}_minwidth=10 midlayer1_{533bcd00-aa76-48c8-a1a6-f2b08f64b16e}_maxwidth=5.78 midlayer1_{533bcd00-aa76-48c8-a1a6-f2b08f64b16e}_prefwidth=5.78 midlayer2_{533bcd00-aa76-48c8-a1a6-f2b08f64b16e}_minwidth=10 midlayer2_{533bcd00-aa76-48c8-a1a6-f2b08f64b16e}_maxwidth=5.78 midlayer2_{533bcd00-aa76-48c8-a1a6-f2b08f64b16e}_prefwidth=5.78 bottomlayer_{533bcd00-aa76-48c8-a1a6-f2b08f64b16e}_minwidth=10 bottomlayer_{533bcd00-aa76-48c8-a1a6-f2b08f64b16e}_maxwidth=5.78 bottomlayer_{533bcd00-aa76-48c8-a1a6-f2b08f64b16e}_prefwidth=5.78 minimp=50.000000 maximp=50.000000 favimp=50.000000
Width "Schematic Width Constraint_7" [InNet('RF-OUT')] p27: maxlimit=10 minlimit=5.78 preferedwidth=10 toplayer_maxwidth=5.78 midlayer1_minwidth=10 midlayer2_minwidth=10 bottomlayer_minwidth=10 substack1={533BCD00-AA76-48C8-A1A6-F2B08F64B16E} toplayer_{533bcd00-aa76-48c8-a1a6-f2b08f64b16e}_minwidth=10 toplayer_{533bcd00-aa76-48c8-a1a6-f2b08f64b16e}_maxwidth=5.78 toplayer_{533bcd00-aa76-48c8-a1a6-f2b08f64b16e}_prefwidth=5.78 midlayer1_{533bcd00-aa76-48c8-a1a6-f2b08f64b16e}_minwidth=10 midlayer1_{533bcd00-aa76-48c8-a1a6-f2b08f64b16e}_maxwidth=5.78 midlayer1_{533bcd00-aa76-48c8-a1a6-f2b08f64b16e}_prefwidth=5.78 midlayer2_{533bcd00-aa76-48c8-a1a6-f2b08f64b16e}_minwidth=10 midlayer2_{533bcd00-aa76-48c8-a1a6-f2b08f64b16e}_maxwidth=5.78 midlayer2_{533bcd00-aa76-48c8-a1a6-f2b08f64b16e}_prefwidth=5.78 bottomlayer_{533bcd00-aa76-48c8-a1a6-f2b08f64b16e}_minwidth=10 bottomlayer_{533bcd00-aa76-48c8-a1a6-f2b08f64b16e}_maxwidth=5.78 bottomlayer_{533bcd00-aa76-48c8-a1a6-f2b08f64b16e}_prefwidth=5.78 minimp=50.000000 maximp=50.000000 favimp=50.000000
Width "Schematic Width Constraint_6" [InNet('S1_90')] p28: maxlimit=10 minlimit=5.78 preferedwidth=10 toplayer_maxwidth=5.78 midlayer1_minwidth=10 midlayer2_minwidth=10 bottomlayer_minwidth=10 substack1={533BCD00-AA76-48C8-A1A6-F2B08F64B16E} toplayer_{533bcd00-aa76-48c8-a1a6-f2b08f64b16e}_minwidth=10 toplayer_{533bcd00-aa76-48c8-a1a6-f2b08f64b16e}_maxwidth=5.78 toplayer_{533bcd00-aa76-48c8-a1a6-f2b08f64b16e}_prefwidth=5.78 midlayer1_{533bcd00-aa76-48c8-a1a6-f2b08f64b16e}_minwidth=10 midlayer1_{533bcd00-aa76-48c8-a1a6-f2b08f64b16e}_maxwidth=5.78 midlayer1_{533bcd00-aa76-48c8-a1a6-f2b08f64b16e}_prefwidth=5.78 midlayer2_{533bcd00-aa76-48c8-a1a6-f2b08f64b16e}_minwidth=10 midlayer2_{533bcd00-aa76-48c8-a1a6-f2b08f64b16e}_maxwidth=5.78 midlayer2_{533bcd00-aa76-48c8-a1a6-f2b08f64b16e}_prefwidth=5.78 bottomlayer_{533bcd00-aa76-48c8-a1a6-f2b08f64b16e}_minwidth=10 bottomlayer_{533bcd00-aa76-48c8-a1a6-f2b08f64b16e}_maxwidth=5.78 bottomlayer_{533bcd00-aa76-48c8-a1a6-f2b08f64b16e}_prefwidth=5.78 minimp=50.000000 maximp=50.000000 favimp=50.000000
Width "Schematic Width Constraint_5" [InNet('S2_0_1')] p29: maxlimit=10 minlimit=5.78 preferedwidth=10 toplayer_maxwidth=5.78 midlayer1_minwidth=10 midlayer2_minwidth=10 bottomlayer_minwidth=10 substack1={533BCD00-AA76-48C8-A1A6-F2B08F64B16E} toplayer_{533bcd00-aa76-48c8-a1a6-f2b08f64b16e}_minwidth=10 toplayer_{533bcd00-aa76-48c8-a1a6-f2b08f64b16e}_maxwidth=5.78 toplayer_{533bcd00-aa76-48c8-a1a6-f2b08f64b16e}_prefwidth=5.78 midlayer1_{533bcd00-aa76-48c8-a1a6-f2b08f64b16e}_minwidth=10 midlayer1_{533bcd00-aa76-48c8-a1a6-f2b08f64b16e}_maxwidth=5.78 midlayer1_{533bcd00-aa76-48c8-a1a6-f2b08f64b16e}_prefwidth=5.78 midlayer2_{533bcd00-aa76-48c8-a1a6-f2b08f64b16e}_minwidth=10 midlayer2_{533bcd00-aa76-48c8-a1a6-f2b08f64b16e}_maxwidth=5.78 midlayer2_{533bcd00-aa76-48c8-a1a6-f2b08f64b16e}_prefwidth=5.78 bottomlayer_{533bcd00-aa76-48c8-a1a6-f2b08f64b16e}_minwidth=10 bottomlayer_{533bcd00-aa76-48c8-a1a6-f2b08f64b16e}_maxwidth=5.78 bottomlayer_{533bcd00-aa76-48c8-a1a6-f2b08f64b16e}_prefwidth=5.78 minimp=50.000000 maximp=50.000000 favimp=50.000000
Width "Schematic Width Constraint_4" [InNet('RF-IN')] p30: maxlimit=10 minlimit=5.78 preferedwidth=10 toplayer_maxwidth=5.78 midlayer1_minwidth=10 midlayer2_minwidth=10 bottomlayer_minwidth=10 substack1={533BCD00-AA76-48C8-A1A6-F2B08F64B16E} toplayer_{533bcd00-aa76-48c8-a1a6-f2b08f64b16e}_minwidth=10 toplayer_{533bcd00-aa76-48c8-a1a6-f2b08f64b16e}_maxwidth=5.78 toplayer_{533bcd00-aa76-48c8-a1a6-f2b08f64b16e}_prefwidth=5.78 midlayer1_{533bcd00-aa76-48c8-a1a6-f2b08f64b16e}_minwidth=10 midlayer1_{533bcd00-aa76-48c8-a1a6-f2b08f64b16e}_maxwidth=5.78 midlayer1_{533bcd00-aa76-48c8-a1a6-f2b08f64b16e}_prefwidth=5.78 midlayer2_{533bcd00-aa76-48c8-a1a6-f2b08f64b16e}_minwidth=10 midlayer2_{533bcd00-aa76-48c8-a1a6-f2b08f64b16e}_maxwidth=5.78 midlayer2_{533bcd00-aa76-48c8-a1a6-f2b08f64b16e}_prefwidth=5.78 bottomlayer_{533bcd00-aa76-48c8-a1a6-f2b08f64b16e}_minwidth=10 bottomlayer_{533bcd00-aa76-48c8-a1a6-f2b08f64b16e}_maxwidth=5.78 bottomlayer_{533bcd00-aa76-48c8-a1a6-f2b08f64b16e}_prefwidth=5.78 minimp=50.000000 maximp=50.000000 favimp=50.000000
Width "Schematic Width Constraint_3" [InNet('S1_0')] p31: maxlimit=10 minlimit=5.78 preferedwidth=10 toplayer_maxwidth=5.78 midlayer1_minwidth=10 midlayer2_minwidth=10 bottomlayer_minwidth=10 substack1={533BCD00-AA76-48C8-A1A6-F2B08F64B16E} toplayer_{533bcd00-aa76-48c8-a1a6-f2b08f64b16e}_minwidth=10 toplayer_{533bcd00-aa76-48c8-a1a6-f2b08f64b16e}_maxwidth=5.78 toplayer_{533bcd00-aa76-48c8-a1a6-f2b08f64b16e}_prefwidth=5.78 midlayer1_{533bcd00-aa76-48c8-a1a6-f2b08f64b16e}_minwidth=10 midlayer1_{533bcd00-aa76-48c8-a1a6-f2b08f64b16e}_maxwidth=5.78 midlayer1_{533bcd00-aa76-48c8-a1a6-f2b08f64b16e}_prefwidth=5.78 midlayer2_{533bcd00-aa76-48c8-a1a6-f2b08f64b16e}_minwidth=10 midlayer2_{533bcd00-aa76-48c8-a1a6-f2b08f64b16e}_maxwidth=5.78 midlayer2_{533bcd00-aa76-48c8-a1a6-f2b08f64b16e}_prefwidth=5.78 bottomlayer_{533bcd00-aa76-48c8-a1a6-f2b08f64b16e}_minwidth=10 bottomlayer_{533bcd00-aa76-48c8-a1a6-f2b08f64b16e}_maxwidth=5.78 bottomlayer_{533bcd00-aa76-48c8-a1a6-f2b08f64b16e}_prefwidth=5.78 minimp=50.000000 maximp=50.000000 favimp=50.000000
Width "Schematic Width Constraint_2" [InNet('S3_90_2')] p32: maxlimit=10 minlimit=5.78 preferedwidth=10 toplayer_maxwidth=5.78 midlayer1_minwidth=10 midlayer2_minwidth=10 bottomlayer_minwidth=10 substack1={533BCD00-AA76-48C8-A1A6-F2B08F64B16E} toplayer_{533bcd00-aa76-48c8-a1a6-f2b08f64b16e}_minwidth=10 toplayer_{533bcd00-aa76-48c8-a1a6-f2b08f64b16e}_maxwidth=5.78 toplayer_{533bcd00-aa76-48c8-a1a6-f2b08f64b16e}_prefwidth=5.78 midlayer1_{533bcd00-aa76-48c8-a1a6-f2b08f64b16e}_minwidth=10 midlayer1_{533bcd00-aa76-48c8-a1a6-f2b08f64b16e}_maxwidth=5.78 midlayer1_{533bcd00-aa76-48c8-a1a6-f2b08f64b16e}_prefwidth=5.78 midlayer2_{533bcd00-aa76-48c8-a1a6-f2b08f64b16e}_minwidth=10 midlayer2_{533bcd00-aa76-48c8-a1a6-f2b08f64b16e}_maxwidth=5.78 midlayer2_{533bcd00-aa76-48c8-a1a6-f2b08f64b16e}_prefwidth=5.78 bottomlayer_{533bcd00-aa76-48c8-a1a6-f2b08f64b16e}_minwidth=10 bottomlayer_{533bcd00-aa76-48c8-a1a6-f2b08f64b16e}_maxwidth=5.78 bottomlayer_{533bcd00-aa76-48c8-a1a6-f2b08f64b16e}_prefwidth=5.78 minimp=50.000000 maximp=50.000000 favimp=50.000000
Width "Schematic Width Constraint_1" [InNet('RF2')] p33: maxlimit=10 minlimit=5.78 preferedwidth=10 toplayer_maxwidth=5.78 midlayer1_minwidth=10 midlayer2_minwidth=10 bottomlayer_minwidth=10 substack1={533BCD00-AA76-48C8-A1A6-F2B08F64B16E} toplayer_{533bcd00-aa76-48c8-a1a6-f2b08f64b16e}_minwidth=10 toplayer_{533bcd00-aa76-48c8-a1a6-f2b08f64b16e}_maxwidth=5.78 toplayer_{533bcd00-aa76-48c8-a1a6-f2b08f64b16e}_prefwidth=5.78 midlayer1_{533bcd00-aa76-48c8-a1a6-f2b08f64b16e}_minwidth=10 midlayer1_{533bcd00-aa76-48c8-a1a6-f2b08f64b16e}_maxwidth=5.78 midlayer1_{533bcd00-aa76-48c8-a1a6-f2b08f64b16e}_prefwidth=5.78 midlayer2_{533bcd00-aa76-48c8-a1a6-f2b08f64b16e}_minwidth=10 midlayer2_{533bcd00-aa76-48c8-a1a6-f2b08f64b16e}_maxwidth=5.78 midlayer2_{533bcd00-aa76-48c8-a1a6-f2b08f64b16e}_prefwidth=5.78 bottomlayer_{533bcd00-aa76-48c8-a1a6-f2b08f64b16e}_minwidth=10 bottomlayer_{533bcd00-aa76-48c8-a1a6-f2b08f64b16e}_maxwidth=5.78 bottomlayer_{533bcd00-aa76-48c8-a1a6-f2b08f64b16e}_prefwidth=5.78 minimp=50.000000 maximp=50.000000 favimp=50.000000
Width "Schematic Width Constraint" [InNet('S4_0_1')] p34: maxlimit=10 minlimit=5.78 preferedwidth=10 toplayer_maxwidth=5.78 midlayer1_minwidth=10 midlayer2_minwidth=10 bottomlayer_minwidth=10 substack1={533BCD00-AA76-48C8-A1A6-F2B08F64B16E} toplayer_{533bcd00-aa76-48c8-a1a6-f2b08f64b16e}_minwidth=10 toplayer_{533bcd00-aa76-48c8-a1a6-f2b08f64b16e}_maxwidth=5.78 toplayer_{533bcd00-aa76-48c8-a1a6-f2b08f64b16e}_prefwidth=5.78 midlayer1_{533bcd00-aa76-48c8-a1a6-f2b08f64b16e}_minwidth=10 midlayer1_{533bcd00-aa76-48c8-a1a6-f2b08f64b16e}_maxwidth=5.78 midlayer1_{533bcd00-aa76-48c8-a1a6-f2b08f64b16e}_prefwidth=5.78 midlayer2_{533bcd00-aa76-48c8-a1a6-f2b08f64b16e}_minwidth=10 midlayer2_{533bcd00-aa76-48c8-a1a6-f2b08f64b16e}_maxwidth=5.78 midlayer2_{533bcd00-aa76-48c8-a1a6-f2b08f64b16e}_prefwidth=5.78 bottomlayer_{533bcd00-aa76-48c8-a1a6-f2b08f64b16e}_minwidth=10 bottomlayer_{533bcd00-aa76-48c8-a1a6-f2b08f64b16e}_maxwidth=5.78 bottomlayer_{533bcd00-aa76-48c8-a1a6-f2b08f64b16e}_prefwidth=5.78 minimp=50.000000 maximp=50.000000 favimp=50.000000
Width "Schematic Width Constraint_23" [InNet('C1_0_1')] p35: maxlimit=10 minlimit=5.78 preferedwidth=10 toplayer_maxwidth=5.78 midlayer1_minwidth=10 midlayer2_minwidth=10 bottomlayer_minwidth=10 substack1={533BCD00-AA76-48C8-A1A6-F2B08F64B16E} toplayer_{533bcd00-aa76-48c8-a1a6-f2b08f64b16e}_minwidth=10 toplayer_{533bcd00-aa76-48c8-a1a6-f2b08f64b16e}_maxwidth=5.78 toplayer_{533bcd00-aa76-48c8-a1a6-f2b08f64b16e}_prefwidth=5.78 midlayer1_{533bcd00-aa76-48c8-a1a6-f2b08f64b16e}_minwidth=10 midlayer1_{533bcd00-aa76-48c8-a1a6-f2b08f64b16e}_maxwidth=5.78 midlayer1_{533bcd00-aa76-48c8-a1a6-f2b08f64b16e}_prefwidth=5.78 midlayer2_{533bcd00-aa76-48c8-a1a6-f2b08f64b16e}_minwidth=10 midlayer2_{533bcd00-aa76-48c8-a1a6-f2b08f64b16e}_maxwidth=5.78 midlayer2_{533bcd00-aa76-48c8-a1a6-f2b08f64b16e}_prefwidth=5.78 bottomlayer_{533bcd00-aa76-48c8-a1a6-f2b08f64b16e}_minwidth=10 bottomlayer_{533bcd00-aa76-48c8-a1a6-f2b08f64b16e}_maxwidth=5.78 bottomlayer_{533bcd00-aa76-48c8-a1a6-f2b08f64b16e}_prefwidth=5.78 minimp=50.000000 maximp=50.000000 favimp=50.000000
Width [All] p36: maxlimit=10 minlimit=10 preferedwidth=10
30 further rules are at their usual default settings.

## Components (designator, comment, footprint, x,y, rotation, side; value= is the part's Value field where it differs from the comment)
A1 "IDT-F1958" VFQFPN-24 3000,4000 r0 top
A2 "IDT-F1958" VFQFPN-24 3000,3500 r0 top
A3 "IDT-F1958" VFQFPN-24 3000,3050 r0 top
A4 "IDT-F1958" VFQFPN-24 3000,2700 r0 top
A5 "IDT-F1958" VFQFPN-24 3000,2250 r0 top
A6 "IDT-F1958" VFQFPN-24 3000,1700 r0 top
A7 "IDT-F1958" VFQFPN-24 3000,1350 r0 top
A8 "IDT-F1958" VFQFPN-24 3000,1000 r0 top
C1 "100pF" CAPC1608X90X35ML15T15 2650,658.46 r270 top
C2 "100pF" CAPC1608X90X35ML15T15 2750,695 r270 top
C3 "100pF" CAPC1608X90X35ML15T15 2850,660 r270 top
C4 "100pF" CAPC1608X90X35ML15T15 2950,700 r270 top
C5 "100pF" CAPC1608X90X35ML15T15 3050,660 r270 top
C6 "100pF" CAPC1608X90X35ML15T15 3150,700 r270 top
C7 "100pF" CAPC1608X90X35ML15T15 3250,660 r270 top
C8 "10nF" *CAPC1608X90 2680,4108.46 r270 bottom
C9 "10nF" *CAPC1608X90 2685,3640 r270 bottom
C10 "10nF" *CAPC1608X90 2675,3245 r270 bottom
C11 "10nF" *CAPC1608X90 2715,2865 r270 bottom
C12 "10nF" *CAPC1608X90 2710,2515 r270 bottom
C13 "10nF" *CAPC1608X90 2685,2045 r270 bottom
C14 "10nF" *CAPC1608X90 2675,1535 r270 bottom
C15 "10nF" *CAPC1608X90 2765,1075 r270 bottom
CS1 "PS3216GT2-R50-T5" *SUSUMU_PS3216GT2-R50-T5_PS3216GT2-R50-T5(Primary) 2225,3750 r90 top
CS2 "PS3216GT2-R50-T5" *SUSUMU_PS3216GT2-R50-T5_PS3216GT2-R50-T5(Primary) 2225,2875 r90 top
CS3 "PS3216GT2-R50-T5" *SUSUMU_PS3216GT2-R50-T5_PS3216GT2-R50-T5(Primary) 2225,1975 r90 top
CS4 "PS3216GT2-R50-T5" *SUSUMU_PS3216GT2-R50-T5_PS3216GT2-R50-T5(Primary) 2225,1175 r90 top
CS5 "PS3216GT2-R50-T5" *SUSUMU_PS3216GT2-R50-T5_PS3216GT2-R50-T5(Primary) 1550,3312.5 r90 top
CS6 "PS3216GT2-R50-T5" *SUSUMU_PS3216GT2-R50-T5_PS3216GT2-R50-T5(Primary) 1550,1575 r90 top
CS7 "JH-121-PIN" FP-2 790.2,2427.83 r90 top
J1 "SMA 50 Ohm edge" SMA-OSHPARK-4L-1.6MM 5,4650 r0 top
J2 "SMA 50 Ohm edge" SMA-OSHPARK-4L-1.6MM 5995,4650 r180 top
J3 "SMA 50 Ohm edge" SMA-OSHPARK-4L-1.6MM 5995,2500 r180 top
J4 "SMA 50 Ohm edge" SMA-OSHPARK-4L-1.6MM 5,2500 r0 top
R1 "100" RESC1608X55X30LL20T20 2650,795 r90 top
R2 "100" RESC1608X55X30LL20T20 2750,830 r90 top
R3 "100" RESC1608X55X30LL20T20 2845,795 r90 top
R4 "100" RESC1608X55X30LL20T20 2945,835 r90 top
R5 "100" RESC1608X55X30LL20T20 3050,795 r90 top
R6 "100" RESC1608X55X30LL20T20 3150,835 r90 top
R7 "100" RESC1608X55X30LL20T20 3250,795 r90 top
R8 "0" RESC1608X55X30NL15T15 2765,4111.57 r90 bottom
R9 "0" RESC1608X55X30NL15T15 2770,3645 r90 bottom
R10 "0" RESC1608X55X30NL15T15 2765,3257.73 r90 bottom
R11 "0" RESC1608X55X30NL15T15 2790,2875 r90 bottom
R12 "0" RESC1608X55X30NL15T15 2810,2520 r90 bottom
R13 "0" RESC1608X55X30NL15T15 2785,2046.57 r90 bottom
R14 "0" RESC1608X55X30NL15T15 2780,1540 r90 bottom
R15 "0" RESC1608X55X30NL15T15 2694.09,1085 r90 bottom
S1 "JH-121-PIN" FP-2 5525.2,2422.83 r90 top
S2 "PS3216GT2-R50-T5" *SUSUMU_PS3216GT2-R50-T5_PS3216GT2-R50-T5(Primary) 4400,3312.5 r270 top
S3 "PS3216GT2-R50-T5" *SUSUMU_PS3216GT2-R50-T5_PS3216GT2-R50-T5(Primary) 4400,1575 r270 top
S4 "PS3216GT2-R50-T5" *SUSUMU_PS3216GT2-R50-T5_PS3216GT2-R50-T5(Primary) 3745,3750 r270 top
S5 "PS3216GT2-R50-T5" *SUSUMU_PS3216GT2-R50-T5_PS3216GT2-R50-T5(Primary) 3745,2875 r270 top
S6 "PS3216GT2-R50-T5" *SUSUMU_PS3216GT2-R50-T5_PS3216GT2-R50-T5(Primary) 3745,1975 r270 top
S7 "PS3216GT2-R50-T5" *SUSUMU_PS3216GT2-R50-T5_PS3216GT2-R50-T5(Primary) 3745,1175 r270 top
T1 "C20A50Z4" C20A50Z4 5775,2850 r90 top
T2 "C20A50Z4" C20A50Z4 145,2850 r270 top
U1 "N2520-6V0C-RB-WE" *3M_N2520-6V0C-RB-WE 3000,316 r0 top

## Footprints (in the part's own frame and the unit in brackets; to place one, negate y for a bottom-side part, rotate by r counter-clockwise, add the part's x,y. Pads: shape width x height; smd on the part's side, far side on the other; paste and mask are expansions set on the pad)
*3M_N2520-6V0C-RB-WE [mil]
  rect 52x204 smd: 1(-450,-134) 2(-450,134) 3(-350,-134) 4(-350,134) 5(-250,-134) 6(-250,134) 7(-150,-134) 8(-150,134) 9(-50,-134) 10(-50,134) 11(50,-134) 12(50,134) 13(150,-134) 14(150,134) 15(250,-134) 16(250,134) 17(350,-134) 18(350,134) 19(450,-134) 20(450,134)
  silkscreen extent -644,-304 644,169
*CAPC1608X90 [mm]
  rect 1.1x1 smd: 1(-0.85,0) 2(0.85,0)
  silkscreen extent -0.15,-0.45 0.15,0.45
*SUSUMU_PS3216GT2-R50-T5_PS3216GT2-R50-T5(Primary) [mm]
  rect 0.35x0.4 smd: 1(0,0.8)
  rect 0.4x0.4 smd: 2(-0.525,-0.8) 3(0.525,-0.8) G(0,0)
  Top Layer region: -1.8,0.6 -0.475,0.6 -0.475,0.35 0.475,0.35 0.475,0.6 1.8,0.6 1.8,-0.6 1.025,-0.6 1.025,-0.35 -1.025,-0.35 -1.025,-0.6 -1.8,-0.6
  silkscreen extent -1.6,-0.91 1.6,1.6
C20A50Z4 [mil]
  rect 90x130 smd: 50(0,-30)
  rect 50x25 smd: T(0,87.5)
CAPC1608X90X35ML15T15 [mm] "Chip Capacitor, 2-Leads, Body 1.60x0.81mm, IPC Low Density"
  rect 1.25x1.1 smd: 1(-0.85,0) 2(0.85,0)
  body extent -0.88,-0.48 0.87,0.48, height 0.9
FP-2 [mm]
  rect 0.5x2 smd: 1(2,10.8) 2(4.5,10.8) 3(8.3,10.8) 4(10.9,10.8) 5(2,-1) 6(4.5,-1) 7(8.3,-1) 8(10.9,-1)
RESC1608X55X30LL20T20 [mm] "Chip Resistor, 2-Leads, Body 1.60x0.80mm, IPC High Density"
  rect 0.8x0.9 smd: 1(-0.6,0) 2(0.6,0)
  body extent -0.9,-0.5 0.9,0.5, height 0.55
RESC1608X55X30NL15T15 [mm] "Chip Resistor, 2-Leads, Body 1.60x0.80mm, IPC Medium Density"
  rect 0.8x0.95 smd: 1(-0.675,0) 2(0.675,0)
  body extent -0.87,-0.48 0.87,0.48, height 0.55
SMA-OSHPARK-4L-1.6MM [mil]
  rect 200x90 smd: GND(101,-174) GND(101,174)
  rect 200x90 smd far side: GND(101,-174) GND(101,174)
  rect 200x16 smd: SIG(101,0)
VFQFPN-24 [mm]
  rect 2x2 smd: 0(0,0)
  rect 0.65x0.25 smd: 1(-1.875,1.25) 2(-1.875,0.75) 3(-1.875,0.25) 4(-1.875,-0.25) 5(-1.875,-0.75) 6(-1.875,-1.25) 13(1.875,-1.25) 14(1.875,-0.75) 15(1.875,-0.25) 16(1.875,0.25) 17(1.875,0.75) 18(1.875,1.25)
  rect 0.25x0.65 smd: 7(-1.25,-1.875) 8(-0.75,-1.875) 9(-0.25,-1.875) 10(0.25,-1.875) 11(0.75,-1.875) 12(1.25,-1.875) 19(1.25,1.875) 20(0.75,1.875) 21(0.25,1.875) 22(-0.25,1.875) 23(-0.75,1.875) 24(-1.25,1.875)